# EAGLE board source_eagle (EAGLE 9.6.2)
REV: A
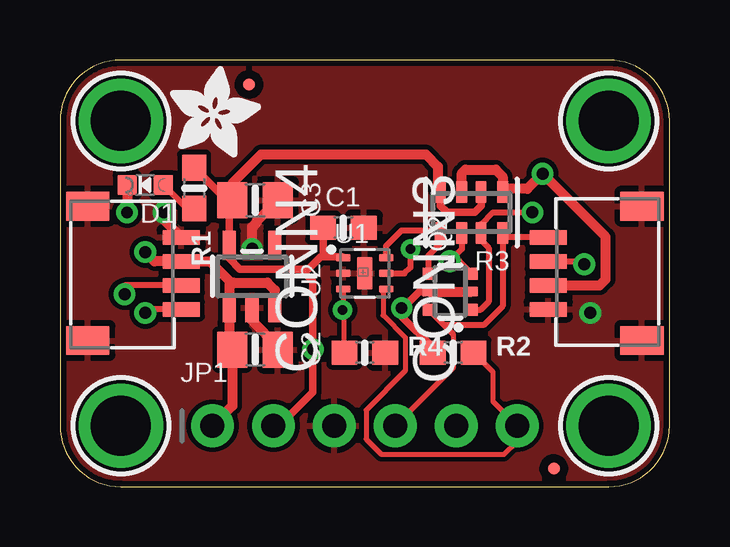
[diagram p0: board, top side]
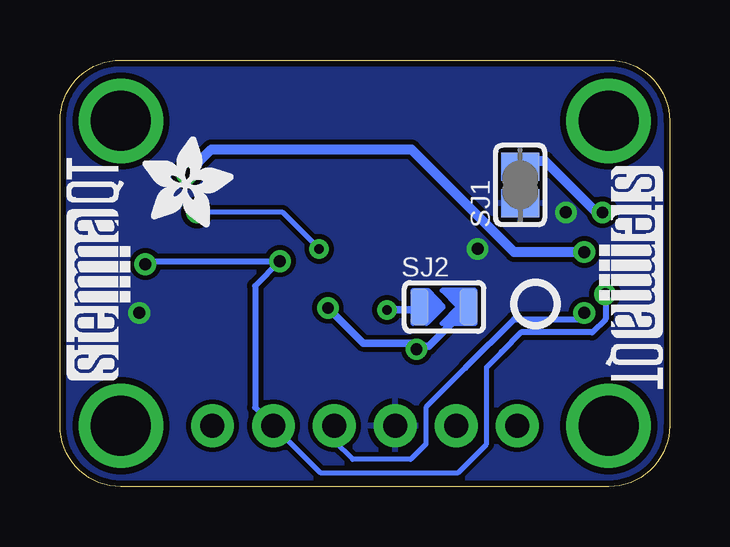
[diagram p1: board, bottom side, seen from below]

Size 25.4 x 17.78 mm. Coordinates in mm from the lower left corner, seen from the top.
Outline: 0,15.24 0,2.54 arc90 2.54,0 22.86,0 arc90 25.4,2.54 25.4,15.24 arc90 22.86,17.78 2.54,17.78 arc90 0,15.24
Copper layers (1*16): Top 0.035mm / dielectric 1.5mm / Bottom 0.035mm
Design rules "adafruit *": minimum track width 8mil, minimum drill 15.5mil, track to track 8mil, track to pad 8mil, pad to pad 8mil, via to via 8mil, smd to smd 8mil, copper to edge 10mil, drill to drill 8mil, minimum pad ring 10mil, minimum via ring 8mil, stop-mask expansion 2mil, vias tented up to drill 20mil, thermal gap 10mil
Net classes: 1 highpower: width 0.406 mm, drill 0.483 mm; 2 lowpower: width 0.305 mm, drill 0.483 mm

## Footprints (pad centres in the part's own frame; a part is rotated, then mirrored left to right if it is on the bottom)
0603-NO = smd 1.075 x 1: 1 -0.85,0; 2 0.85,0
0805-NO = smd 1.24 x 1.5: 1 -0.95,0; 2 0.95,0
JST_SH4 = smd 0.6 x 1.55: 1 -1.5,2.006; 2 -0.5,2.006; 3 0.5,2.006; 4 1.5,2.006 | smd 1.2 x 1.8: MT1 -2.8,-1.894; MT2 2.8,-1.894
CHIPLED_0603_NOOUTLINE = smd 0.8 x 0.8: A 0,-0.75; C 0,0.75
FIDUCIAL_0.5MM = smd 0.5 x 0.5: 1 0,0
1X06_ROUND_70 = drill 1 pad 1.778: 1 -6.35,0; 2 -3.81,0; 3 -1.27,0; 4 1.27,0; 5 3.81,0; 6 6.35,0
SOT363 = smd 0.5 x 0.5: 1 -0.75,-0.9; 3 0.75,-0.9; 4 0.75,0.9; 6 -0.75,0.9 | smd 0.4 x 0.5: 2 0,-0.9; 5 0,0.9
RESPACK_4X0603 = smd 0.45 x 0.9: 1 -1.3,-0.85; 2 -0.4,-0.85; 3 0.4,-0.85; 4 1.3,-0.85; 5 1.3,0.85; 6 0.4,0.85; 7 -0.4,0.85; 8 -1.3,0.85
SOLDERJUMPER_CLOSEDWIRE = smd 1.168 x 1.6: 1 -0.762,0; 2 0.762,0 | smd 0.635 x 0.203: WIRE 0,0
SOLDERJUMPER_ARROW_NOPASTE = smd 0.762 x 1.524: 1 -1.016,0; 2 1.016,0
UTDFN-OPTO-6 = smd 0.6 x 0.3: 1 -0.9,0.65; 2 -0.9,0; 3 -0.9,-0.65; 4 0.9,-0.65; 5 0.9,0; 6 0.9,0.65 | smd 0.65 x 1.35: EP 0,0
SOT23-5 = smd 0.55 x 1.2: 1 -0.95,-1.3; 2 0,-1.3; 3 0.95,-1.3; 4 0.95,1.3; 5 -0.95,1.3
MOUNTINGHOLE_2.5_PLATED = drill 2.5 pad 3.2: P$1 0,0

## Placement (x,y rotation side)
C1  0.1uF  [0603-NO]  11.81,10.79 0 top
C2  10uF  [0805-NO]  8.13,5.71 0 top
C3  10uF  [0805-NO]  8.13,11.94 0 top
CONN3  STEMMA_I2C_QT  [JST_SH4]  22.35,8.89 90 top
CONN4  STEMMA_I2C_QT  [JST_SH4]  3.05,8.89 270 top
D1  GREEN  [CHIPLED_0603_NOOUTLINE]  3.56,12.57 90 top
FID3  FIDUCIAL_0.5MM  [FIDUCIAL_0.5MM]  7.87,16.76 0 top
FID4  FIDUCIAL_0.5MM  [FIDUCIAL_0.5MM]  20.57,0.76 0 top
JP1  [1X06_ROUND_70]  12.7,2.54 0 top
PLABEL0  [PLABEL0]  6.35,0.89 0 top
PLABEL1  [PLABEL1]  8.89,4.19 0 top
PLABEL2  [PLABEL2]  11.43,0.89 0 top
PLABEL3  [PLABEL3]  13.97,4.19 0 top
PLABEL4  [PLABEL4]  16.64,0.89 0 top
PLABEL5  [PLABEL5]  19.05,4.19 0 top
PLABEL8  [PLABEL8]  0.51,12.45 0 top
PLABEL13  [PLABEL13]  12.7,0.89 0 bottom
PLABEL14  [PLABEL14]  6.1,10.03 0 bottom
PLABEL15  [PLABEL15]  8.76,15.37 0 top
PLABEL16  [PLABEL16]  9.53,13.59 0 top
PLABEL17  [PLABEL17]  12.7,16 0 bottom
PLABEL18  [PLABEL18]  12.7,12.7 0 bottom
PLABEL19  [PLABEL19]  9.4,9.27 0 bottom
PLABEL20  [PLABEL20]  12.57,4.32 0 bottom
PLABEL21  [PLABEL21]  16.89,7.37 0 bottom
Q2  BSS138  [SOT363]  16.26,8.13 90 top
R1  10K  [0603-NO]  5.59,12.45 270 top
R2  10K  [0603-NO]  16.38,5.59 0 top
R3  10K Pack  [RESPACK_4X0603]  17.14,11.43 180 top
R4  10K  [0603-NO]  12.7,5.59 0 top
SJ1  [SOLDERJUMPER_CLOSEDWIRE]  6.22,12.57 90 bottom
SJ2  [SOLDERJUMPER_ARROW_NOPASTE]  9.4,7.49 0 bottom
U1  MAX44009EDT+  [UTDFN-OPTO-6]  12.7,8.89 0 top
U2  AP2127K-3.3  [SOT23-5]  8,8.76 0 top
U$1  MOUNTINGHOLE2.5  [MOUNTINGHOLE_2.5_PLATED]  2.54,15.24 0 top
U$2  [ADAFRUIT_3.5MM]  21.97,10.79 0 bottom
U$17  MOUNTINGHOLE2.5  [MOUNTINGHOLE_2.5_PLATED]  22.86,15.24 0 top
U$19  MOUNTINGHOLE2.5  [MOUNTINGHOLE_2.5_PLATED]  2.54,2.54 0 top
U$21  MOUNTINGHOLE2.5  [MOUNTINGHOLE_2.5_PLATED]  22.86,2.54 0 top
U$22  [ADAFRUIT_3.5MM]  4.57,13.72 0 top
U$25  [PCBFEAT-REV-040]  5.59,7.62 0 bottom
U$30  [STEMMAQT]  22.48,4.45 90 bottom
U$31  [STEMMAQT]  2.92,13.34 270 bottom

## Library data of the parts
C1-C3 FID3 FID4 JP1 R1-R4 SJ1 U$2 U$22 U$25 = microbuilder
CONN3 CONN4 = adafruit_electromech; LCSC: C2845363
D1 = microbuilder; ROT: 270
PLABEL0 PLABEL1-PLABEL5 PLABEL8 PLABEL13-PLABEL21 = pinguin
Q2 = microbuilder; JLC_ROTATION: 270
SJ2 = microbuilder; BOM: EXCLUDE
U1 = adafruit_sensor
U2 = adafruit_power; JLC_ROTATION: 270
U$1 U$17 U$19 U$21 = adafruit_electromech; BOM: EXCLUDE
U$30 U$31 = silks

## Nets
3.3V [lowpower]: C1.1 C3.1 JP1.2 Q2.2 Q2.5 R1.1 R2.1 R3.2 R3.4 SJ2.2 U1.1 U2.5
ADDR: R4.1 SJ2.1 U1.3
GND [highpower]: C1.2 C2.2 C3.2 CONN3.1 CONN3.MT1 CONN3.MT2 CONN4.1 CONN4.MT1 CONN4.MT2 JP1.3 R4.2 SJ1.1 U1.2 U1.EP U2.2
INT: JP1.6 R2.2 U1.4
N$1: D1.A R1.2
N$2 [highpower]: D1.C SJ1.2
SCL: CONN3.4 CONN4.4 JP1.4 Q2.6 R3.8
SCL_3V: Q2.1 R3.7 U1.5
SDA: CONN3.3 CONN4.3 JP1.5 Q2.3 R3.6
SDA_3V: Q2.4 R3.5 U1.6
VCC [highpower]: C2.1 CONN3.2 CONN4.2 JP1.1 R3.1 R3.3 U2.1 U2.3

## Tracks (layer width: path | path; a pad name or v marks a point on that pad's centre or on a via)
3.3V  (via drill 0.48)
  Top 0.305: R3.2 17.55,11.7 17.27,11.43 16.13,11.43 15.85,11.71 R3.4 | R1.1 6.95,11.94 C3.1 7.05,11.81 U2.5 7.05,9.51 7.49,9.07 10.03,9.07 | JP1.2 9.14,2.54 10.54,3.94 v10.54,5.73 10.54,8.56 10.03,9.07 | Q2.5 14.97,8.13 14.27,7.42 | v14.24,7.45 14.27,7.42 | R2.1 15.53,5.8 14.27,7.07 14.27,7.42 | U1.1 11.76,9.59 10.92,9.59 | 10.03,9.07 10.34,9.07 10.86,9.59 10.92,9.59 | C1.1 10.96,9.62 10.92,9.59
  Top 0.406: Q2.5 Q2.2 | C3.1 7.18,12.64 8.38,13.84 15.24,13.84 15.75,13.34 15.75,12.38 R3.4
  Bottom 0.305: v14.24,7.45 12.77,5.98 10.79,5.98 10.66,5.85 | v10.54,5.73 10.66,5.85 | SJ2.2 10.03,5.85 10.66,5.85
ADDR  (via drill 0.4)
  Top 0.203: U1.3 11.8,7.39 v11.77,7.37 11.85,7.29 R4.1
  Bottom 0.305: SJ2.1 10.54,7.37 v11.77,7.37
GND  (via drill 0.5)
  Top 0.406: U2.2 8,6.92 9.08,5.84 C2.2 | CONN4.1 4.32,11.13 v4.32,11.43 | v8,9.91 8,10.82 8.2,11.02 8.2,11.06 C3.2
  other vias: 22.1,7.24
  pour Top: 0,17.78 25.4,17.78 25.4,0 0,0
  pour Bottom: 0,17.78 25.4,17.78 25.4,0 0,0
INT
  Top 0.203: U1.4 13.46,8.1 13.46,7.14 14.39,6.21 14.39,4.83 12.75,3.19 12.75,1.98 13.39,1.35 18.49,1.35 19.05,1.91 19.05,2.03 | R2.2 18.03,4.79 18.03,3.56 JP1.6
  Top 0.254: 19.05,2.03 JP1.6
N$1
  Top 0.254: D1.A 5.28,11.6 R1.2
N$2  (via drill 0.48)
  Top 0.406: D1.C 2.81,11.44 v2.79,11.43
  Bottom 0.406: v2.79,11.43 3.05,11.43 5.21,13.59 5.97,13.59 SJ1.2
SCL  (via drill 0.5)
  Top 0.203: JP1.4 16.38,4.95 16.38,6.35
  Top 0.254: CONN3.4 18.64,10.39 R3.8 18.45,7.52 17.65,6.73 16,6.73 Q2.6 16.38,6.35 | CONN4.4 3.71,7.39 v3.56,7.24
  Bottom 0.203: 8.51,4.95 10.16,3.3 10.16,1.78 10.79,1.14 13.21,1.14 13.97,1.91 JP1.4
  Bottom 0.254: 8.51,4.95 6.48,6.99 3.81,6.99 v3.56,7.24
SCL_3V  (via drill 0.4, 0.5)
  Top 0.254: v19.68,11.43 18.03,11.43 17.55,10.94 R3.7 17.55,10.27 17.86,9.95 17.86,7.7 17.54,7.38 Q2.1 | U1.5 14.35,8.89 14.61,9.14 v14.61,9.91
  Bottom 0.203: v14.61,9.91 16.13,11.43 v19.68,11.43
SDA  (via drill 0.5)
  Top 0.254: R3.6 16.75,9.91 v16.24,9.4 16.64,9.4 Q2.3 | CONN4.3 2.69,8.39 v2.69,8.02 | CONN3.3 21.73,9.39 v21.84,9.27
  Bottom 0.203: JP1.5 14.55,0.58 8.81,0.58 7.62,1.78 7.62,4.99 7,5.61
  Bottom 0.254: v2.69,8.02 2.69,7.9 2.67,7.87 2.67,6.99 3.23,6.43 6.18,6.43 7,5.61 | v21.84,9.27 21.72,9.4 v16.24,9.4 17.27,8.36 17.27,3.3 JP1.5
SDA_3V
  Top 0.254: Q2.4 15.36,9.64 15.85,10.13 R3.5 15.76,10.67 14.22,10.67 13.58,10.03 13.58,9.56 U1.6
VCC  (via drill 0.5)
  Top 0.406: R3.3 16.75,13.06 16.89,13.21 18.16,13.21 18.45,12.92 R3.1 18.57,12.41 19.47,12.41 v20.11,13.04 22.73,10.41 22.73,8.64 22.49,8.39 CONN3.2 | U2.3 8.95,8.19 8.64,8.51 7.24,8.51 7.18,8.45 7.05,8.57 | 7.05,8.57 U2.1 7.05,5.84 C2.1 7.18,3.37 JP1.1 | 7.05,8.57 6.24,9.39 CONN4.2 3.94,9.39 v3.56,9.78
  Bottom 0.406: v20.11,13.04 19.09,14.06 10.76,14.06 6.48,9.78 v3.56,9.78

## Text on the board
Pinguin_tBackup: MAX44009 | Lux Sensor
Pinguin_bBackup: MAX44009 | Wide-range / Lux Sensor | Addr | Dynamic Range / 0.045~188kLux | Default I2C Addr 0x4A